# Altium PCB fyFly_cp2.PcbDoc
Units mm, origin at the board's own origin, x right, y up, seen from the top; angles counter-clockwise.
Board outline 49.87 x 64.77 mm, 4 copper layers (Top Layer, MID1, MID2, Bottom Layer), stack 0.603 mm thick; 23 components, 77 nets, 66 pads, 40 vias.
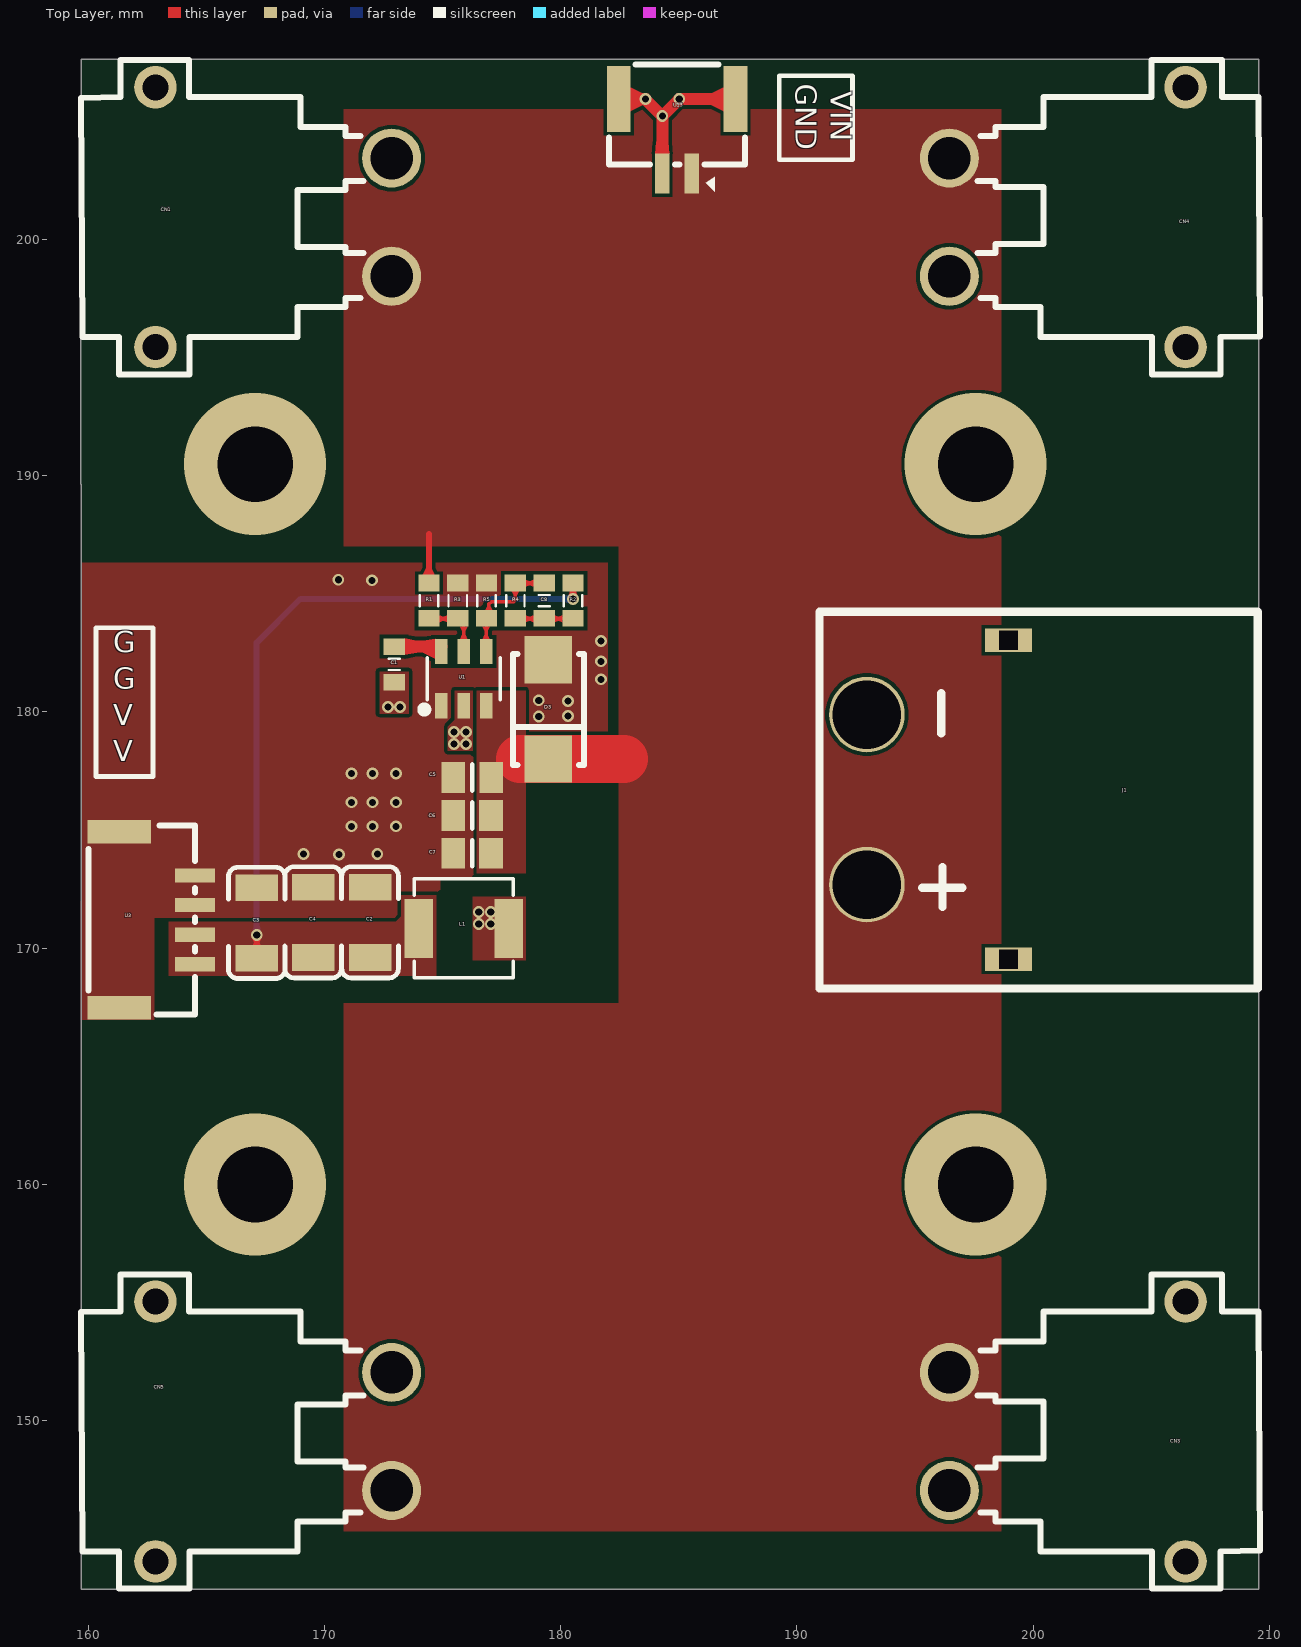
[diagram p0: Top Layer view]
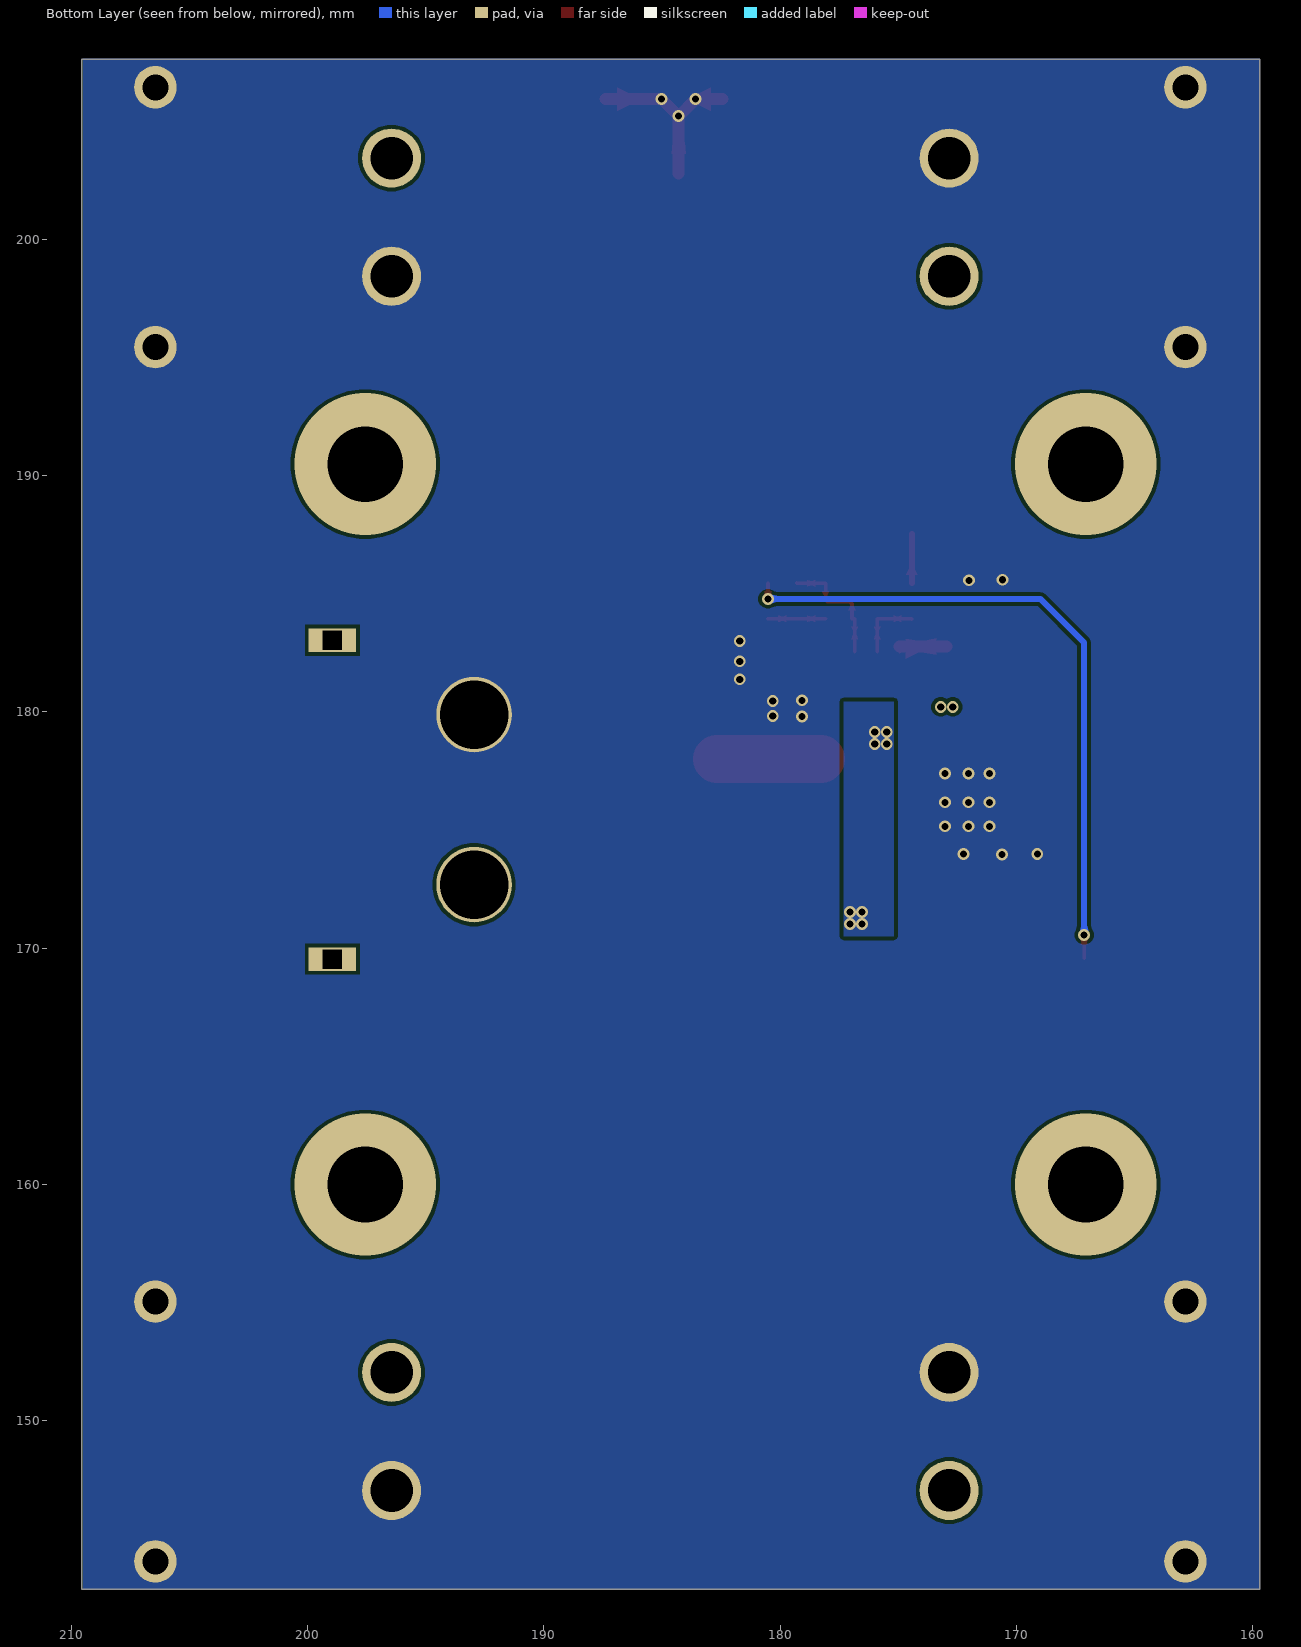
[diagram p1: Bottom Layer view, seen from below]
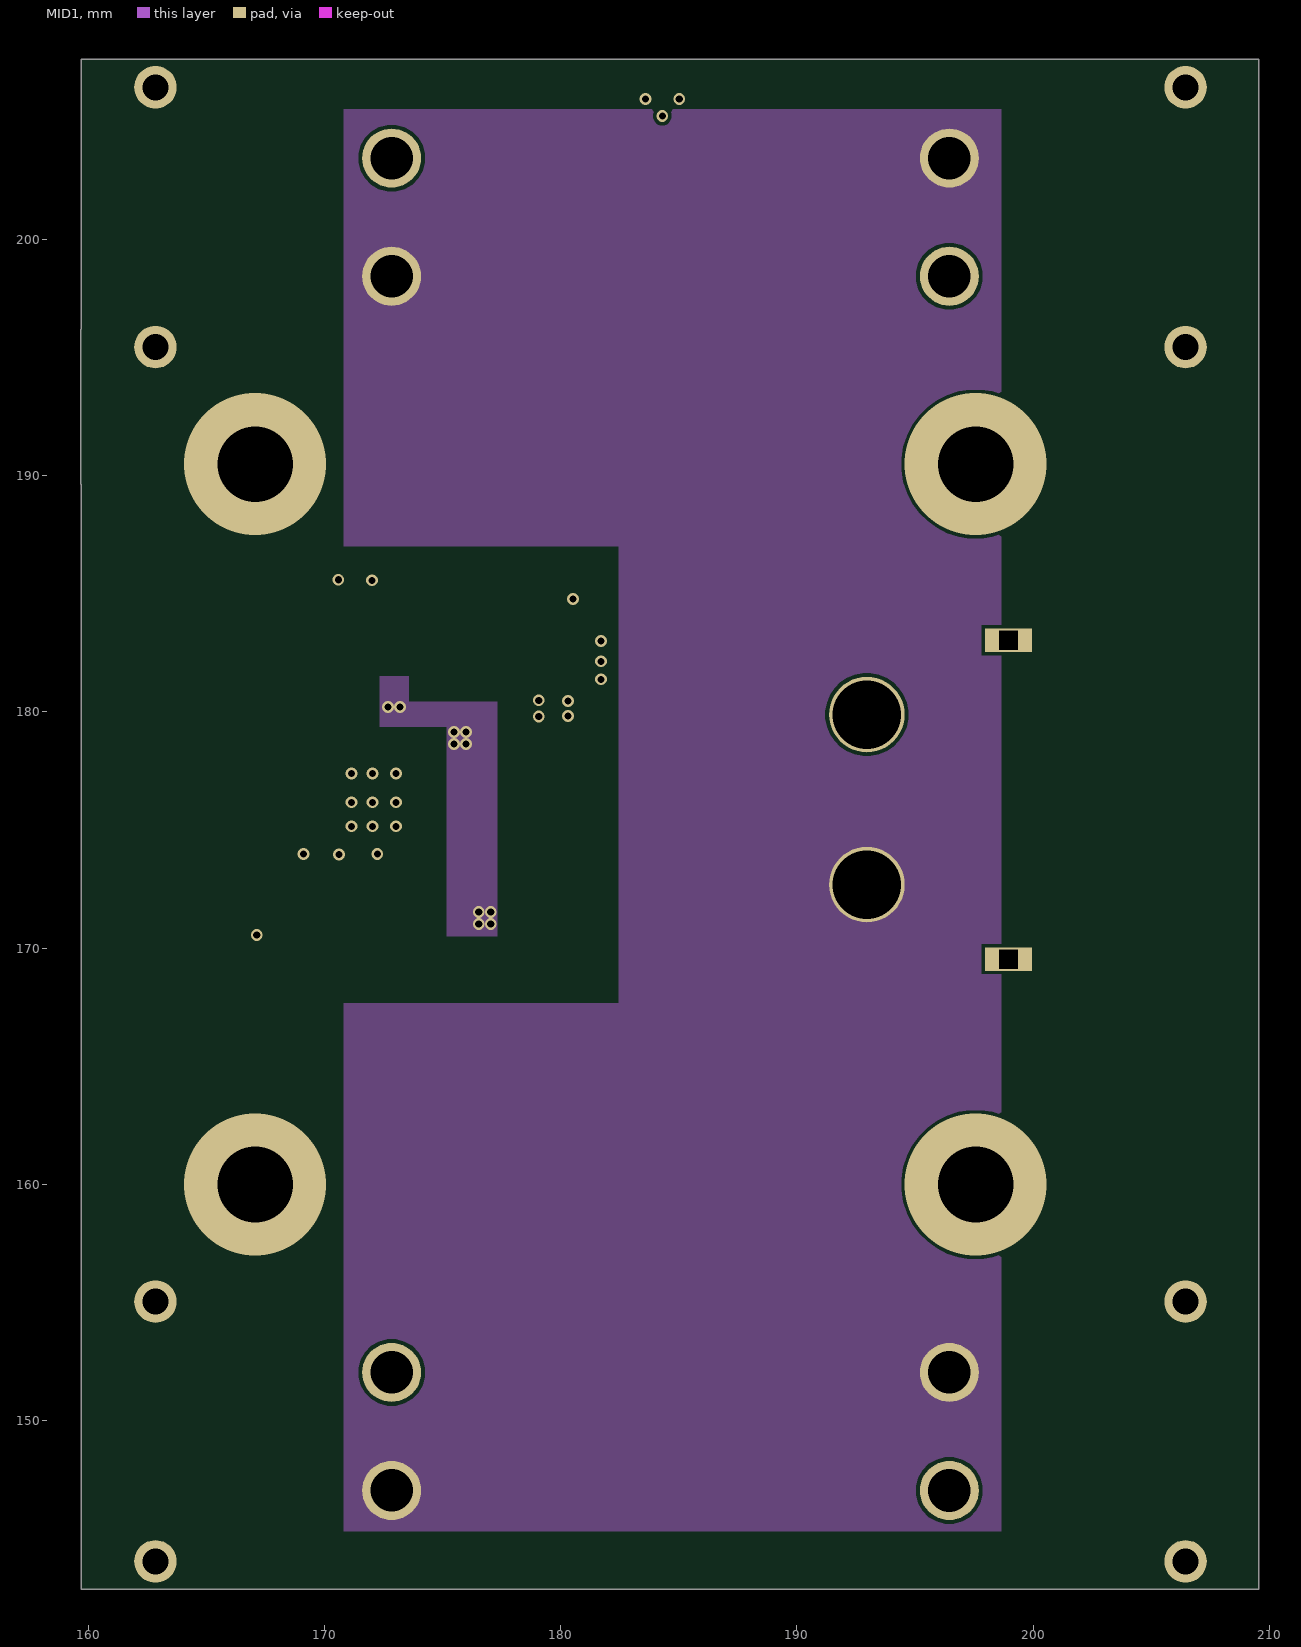
[diagram p2: MID1]
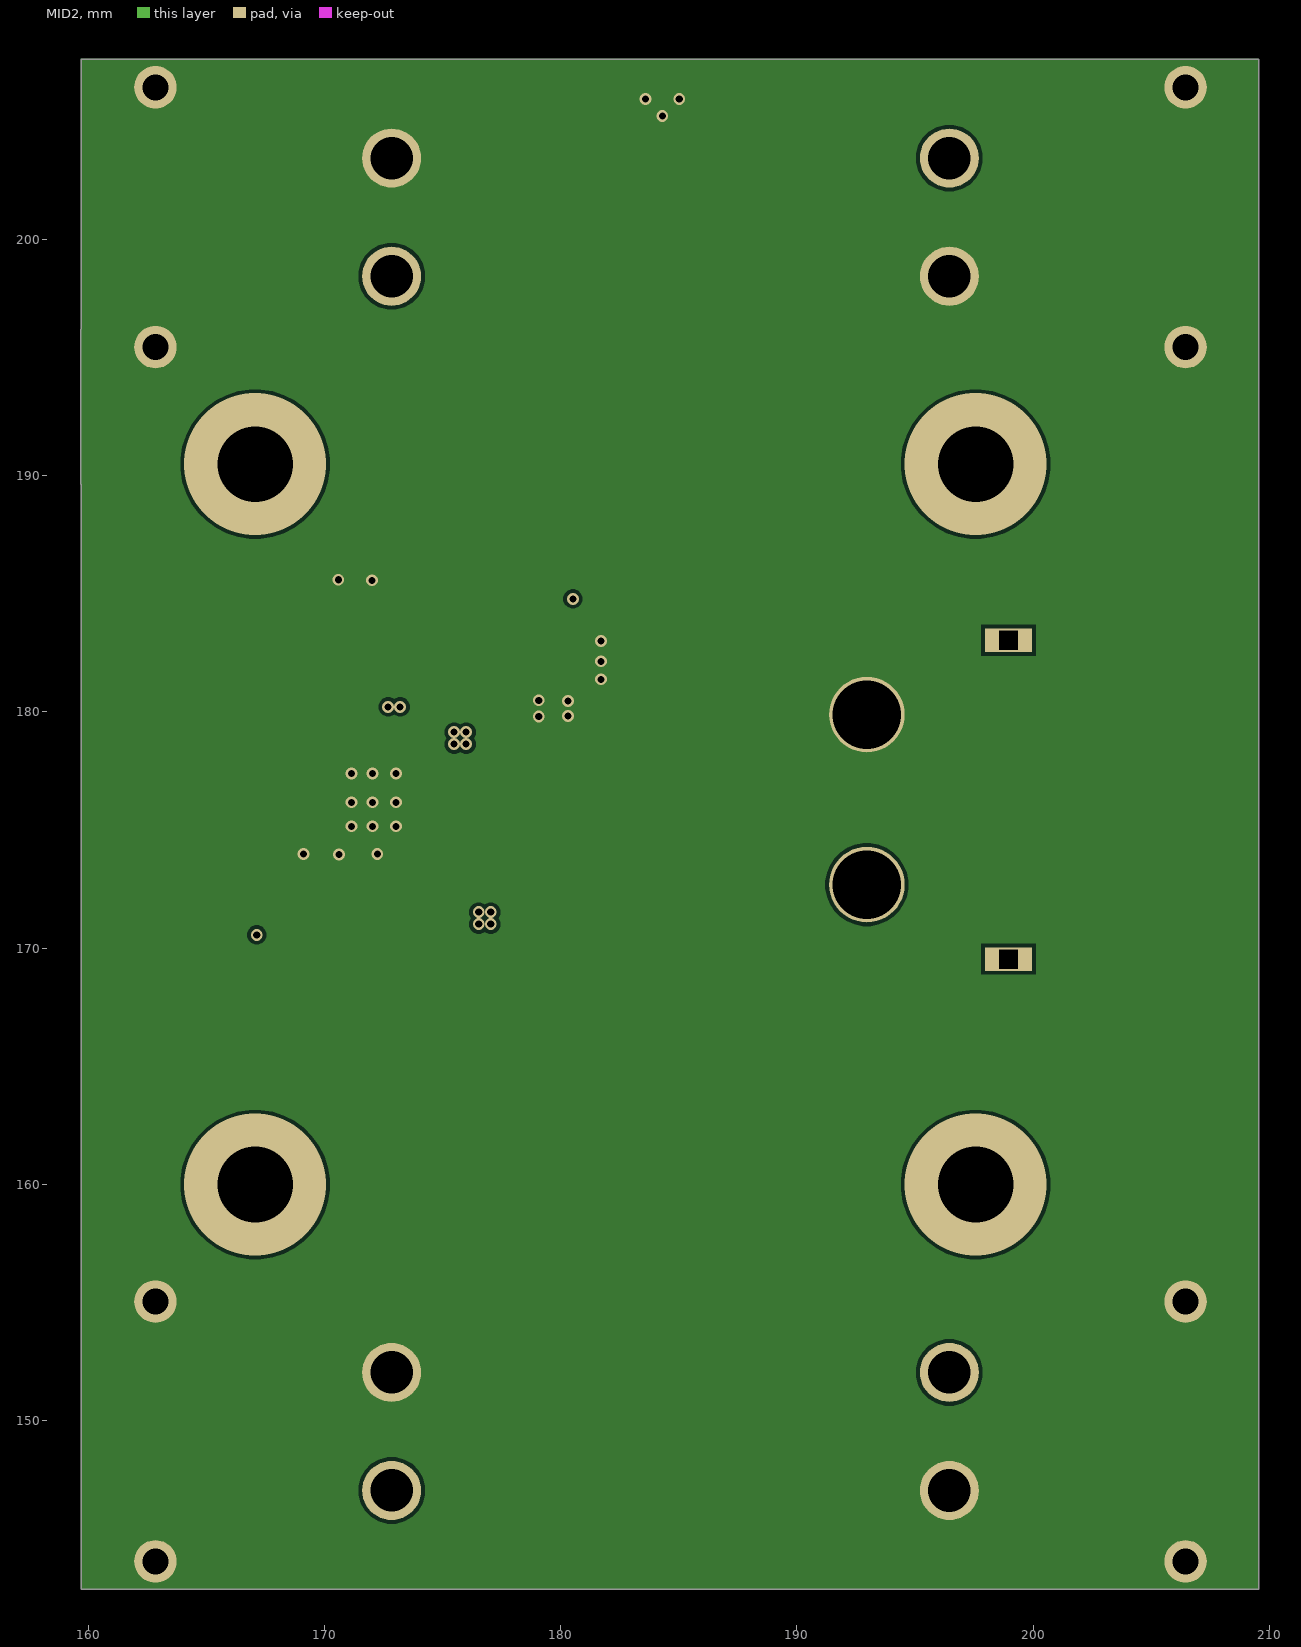
[diagram p3: MID2]
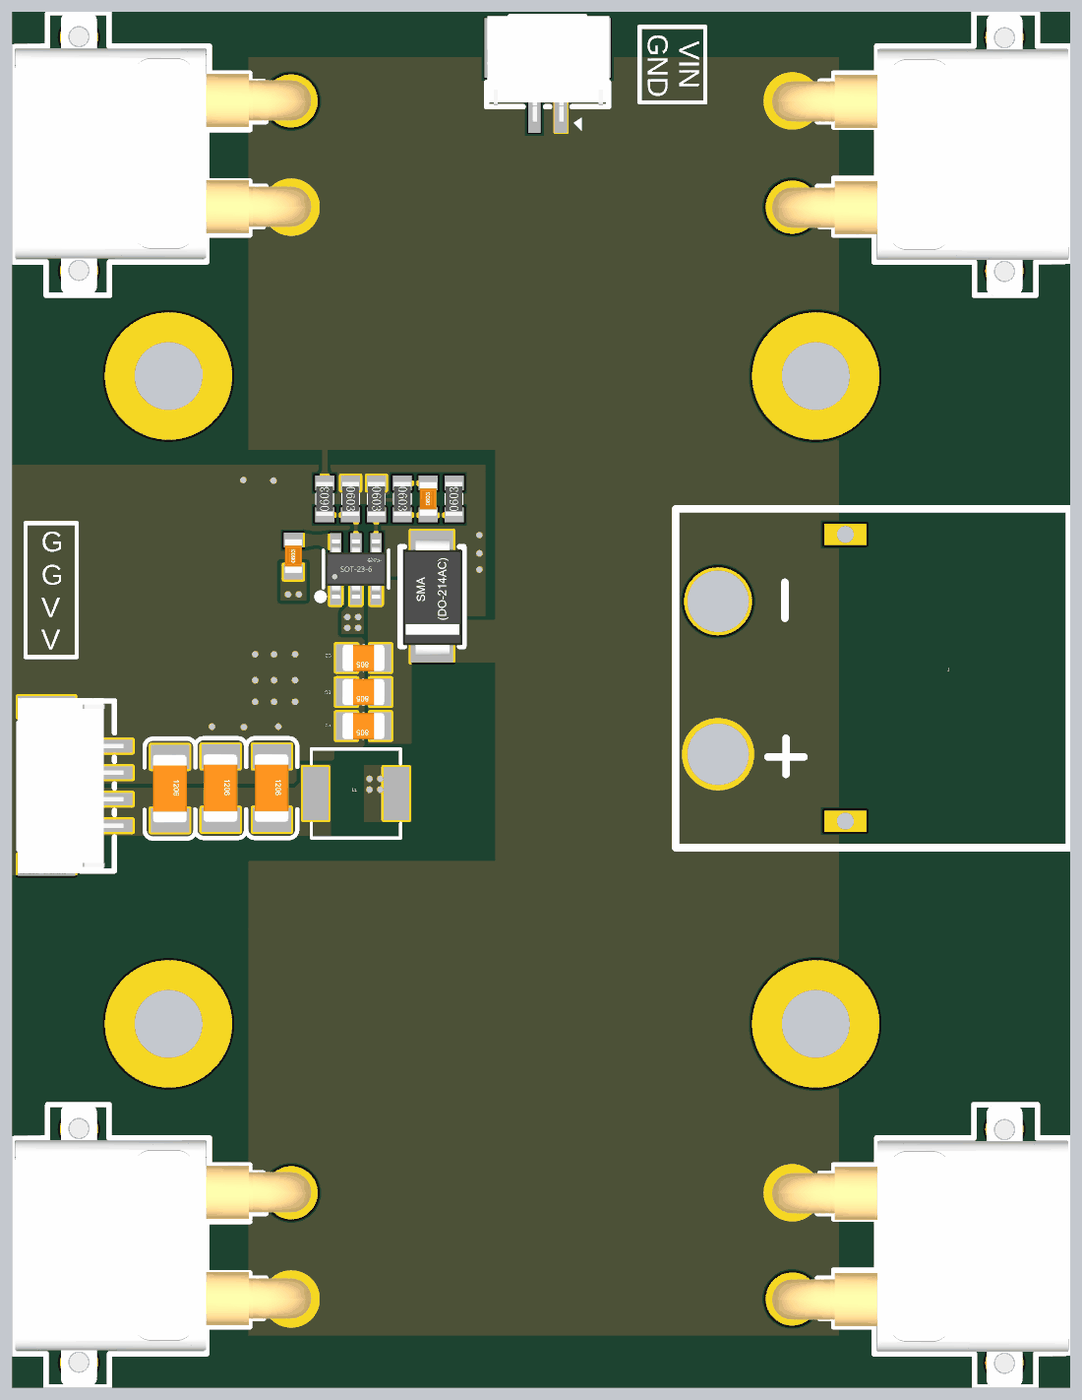
[diagram p4: 3D render of the assembled board from above, using the file's embedded part models]

## Layer stack, top to bottom
Top Solder: solder mask 0.0102, Solder Resist, Dk 3.5
Top Layer: signal copper 0.0356
Dielectric 2: prepreg 0.0711, PP-006, Dk 4.1
MID1: signal copper 0.035
Dielectric 1: dielectric 0.32, FR-4, Dk 4.8
MID2: signal copper 0.035
Dielectric 3: prepreg 0.0711, PP-006, Dk 4.1
Bottom Layer: signal copper 0.0356
Bottom Solder: solder mask 0.0102, Solder Resist, Dk 3.5

## Board outline
159.696,142.868 159.696,189.636 159.69,189.636 159.69,196.208 159.696,196.208 159.696,207.638 209.562,207.638 209.562,142.868

## Design rules (kind name [scope] priority, off if disabled: settings)
Clearance [All] p1: gap=0.152 ignorepadtopadclearanceinfootprint=TRUE except(0: Arc-Hole Track-Hole SMDPad-Hole THPad-Hole Via-Hole Fill-Hole Poly-Hole Region-Hole Text-Hole)
PlaneConnect PlaneConnect_1 [InNet('NetC1_2')] p1: planeconnectstyle=Direct reliefexpansion=0.508 reliefentries=4 reliefconductorwidth=0.254 reliefairgap=0.254
PlaneConnect [All] p2: planeconnectstyle=Direct reliefexpansion=0.508 reliefentries=4 reliefconductorwidth=0.254 reliefairgap=0.254
PolygonConnect PolygonConnect_4 [InNet('VIN_GND')] p1: connectstyle=Direct reliefconductorwidth=0.254 reliefentries=4 polygonreliefangle="90 Angle" airgapwidth=0.254
PolygonConnect PolygonConnect_3 [InNet('VCC-5.0V_OUT')] p2: connectstyle=Direct reliefconductorwidth=0.254 reliefentries=4 polygonreliefangle="90 Angle" airgapwidth=0.254
PolygonConnect PolygonConnect_2 [InNet('VIN')] p3: connectstyle=Direct reliefconductorwidth=0.254 reliefentries=4 polygonreliefangle="90 Angle" airgapwidth=0.254
PolygonConnect PolygonConnect_1 [InNet('NetC1_2')] p4: connectstyle=Direct reliefconductorwidth=0.254 reliefentries=4 polygonreliefangle="90 Angle" airgapwidth=0.254
PolygonConnect [All] p5: connectstyle=Direct reliefconductorwidth=0.254 reliefentries=4 polygonreliefangle="90 Angle" airgapwidth=0.254
RoomDefinition 03_peripheral [InComponentClass('03_peripheral')] p1: confinementstyle=ConfineOut formatcopy=TRUE lockcomponents=FALSE outline 244.653,139.319 515.874,139.319 515.874,158.877 244.653,158.877
RoomDefinition 02_sensor [InComponentClass('02_sensor')] p2: confinementstyle=ConfineOut formatcopy=TRUE lockcomponents=FALSE outline 244.754,162.179 259.334,162.179 259.334,168.021 244.754,168.021
RoomDefinition 01_mcu [InComponentClass('01_mcu')] p3: confinementstyle=ConfineOut formatcopy=TRUE lockcomponents=FALSE outline 244.653,171.45 309.753,171.45 309.753,191.262 244.653,191.262
RoomDefinition 00_power [InComponentClass('00_power')] p4: confinementstyle=ConfineOut formatcopy=TRUE lockcomponents=FALSE outline 244.348,194.437 340.487,194.437 340.487,212.09 244.348,212.09
RoutingVias [All] p1: holewidth=0.3 width=0.5 viastyle="Through Hole" minholewidth=0.3 minwidth=0.5 maxholewidth=225.755 maxwidth=253.975
SolderMaskExpansion [All] p1: expansion=0.102 istentingtop=FALSE
Width [All] p1: maxlimit=253.975 minlimit=0.152 preferedwidth=0.254
29 further rules are at their usual default settings.

## Components (designator, comment, footprint, x,y, rotation, side; value= is the part's Value field where it differs from the comment)
C1 "100nF/35V" 0603-C 172.949,182.016 r0 top
C2 "22uF/16V" 1206-C 171.933,171.094 r0 top
C3 "22uF/16V" 1206-C 167.132,171.069 r0 top
C4 "22uF/16V" 1206-C 169.52,171.094 r0 top
C5 "10uF/35V" 0805-C 176.254,177.222 r90 top
C6 "10uF/35V" 0805-C 176.251,175.616 r90 top
C7 "100nF/35V" 0805-C 176.251,174.015 r90 top
C8 "75pF" 0603-C 179.299,184.709 r0 top
CN1 "XT30PW-M" XT30PW-M 167.844,200.946 r270 top locked
CN3 "XT30PW-M" XT30PW-M 201.452,149.54 r90 top locked
CN4 "XT30PW-M" XT30PW-M 201.452,200.946 r90 top locked
CN5 "XT30PW-M" XT30PW-M 167.844,149.541 r270 top locked
D3 "SMAJ18.0CA" ZENER 179.476,180.111 r90 top
J1 "XT60PW-M" XT60PW-M 192.959,172.688 r270 top
L1 "10uH" "电感 4.2X4.4" 175.895,170.84 r180 top
R1 "511K" 0603-R 174.422,184.709 r180 top
R2 "49.9R" 0603-R 180.518,184.709 r180 top
R3 "105K" 0603-R 175.641,184.709 r0 top
R4 "100K" 0603-R 178.079,184.709 r0 top
R5 "13.3K" 0603-R 176.86,184.709 r0 top
U1 "TPS54302DDCR" TPS54302 175.895,181.407 r0 top
U3 "GH1.25-4P" CONN-SMD_GH1.25-4PWBPZ 162.916,171.196 r90 top
U13 "GH1.25-2P" GH1.25-2P 184.926,204.368 r180 top locked

## Footprints (in the part's own frame and the unit in brackets; to place one, negate y for a bottom-side part, rotate by r counter-clockwise, add the part's x,y. Pads: shape width x height; smd on the part's side, far side on the other; paste and mask are expansions set on the pad)
0603-C [mm]
  rect 0.9x0.7 smd: 1(0,0.75) 2(0,-0.75)
  silkscreen extent -0.24,-0.24 0.24,0.24, body extent -0.41,-0.8 0.41,0.8, height 0.84
0603-R [mm]
  rect 0.9x0.7 smd: 1(0,0.75) 2(0,-0.75)
  silkscreen extent -0.39,-0.24 0.39,0.24, body extent -0.4,-0.8 0.4,0.8, height 0.45
0805-C [mm]
  rect 1.3x1 smd: 1(0,0.8) 2(0,-0.8)
  silkscreen extent -0.55,0 0.55,0, body extent -0.63,-1 0.62,1, height 0.77
1206-C [mm]
  rect 1.8x1.13 smd: 1(0,1.49) 2(0,-1.49)
  silkscreen extent -1.2,-2.36 1.2,2.36, body extent -0.81,-1.6 0.79,1.6, height 1
CONN-SMD_GH1.25-4PWBPZ [mm]
  rect 0.6x1.7 smd: 1(-1.875,-1.601) 2(-0.625,-1.601) 3(0.625,-1.601) 4(1.875,-1.601)
  rect 1x2.7 smd: 5(-3.725,1.601) 6(3.725,1.601)
  silkscreen extent -4,-1.6 4,2.9, body extent -4.13,-2.05 4.13,2.95, height 4.35
GH1.25-2P [mm]
  rect 0.6x1.7 smd paste+0 mask+0.05: 1(-0.625,1.575) 2(0.625,1.575)
  rect 1x2.8 smd paste+0 mask+0.05: 3(2.475,-1.575) 4(-2.475,-1.575)
  silkscreen extent -2.87,-3.05 2.87,2.34, body extent -2.91,-3.07 2.85,1.93, height 4.35
TPS54302 [mm]
  rect 0.532x1.072 smd: 1(-0.95,-1.149) 2(0,-1.149) 3(0.95,-1.149) 4(0.95,1.149) 5(0,1.149) 6(-0.95,1.149)
  silkscreen extent -1.82,-1.45 1.54,0.89, body extent -1.44,-1.4 1.44,1.4, height 1.64
XT30PW-M [mm]
  round 2.5 hole 1.8: 1(-2.5,5) 2(2.5,5)
  round 1.8 hole 1.1: 3(5.5,-5) 4(-5.5,-5)
  silkscreen extent -6.65,-8.15 6.65,3.81, body extent -6.68,-8.01 6.62,5.94, height 5
XT60PW-M [mm]
  round 3.2 hole 2.9: 1(-7.2,0) 2(0,0)
  rect 1x2 hole 0.8 square: 3(3.15,6) 4(-10.35,6)
  silkscreen extent -11.55,-2 4.4,16.55, body extent -11.6,-1.9 4.4,16.5, height 8.5
ZENER [mm]
  rect 2x2 smd: 1(2.1,0) 2(-2.1,0)
  silkscreen extent -2.35,-1.5 2.35,1.5, body extent -2.79,-1.43 2.71,1.37, height 2.6
"电感 4.2X4.4" [mm]
  rect 1.2x2.5 smd: 1(-1.9,0) 2(1.9,0)
  silkscreen extent -2.1,-2.1 2.1,2.1

## Part data
C1 C2 C3 C4 C5 C6 C7 C8: library part C, "贴片电容", BOM名称=无极性贴片电容, 联系卖家，免费查找封装=唯一出售店铺网址https://shop463601444.taobao.com
CN1 CN3 CN4 CN5: Colour=-, Contact Resistance=1.2mΩ, JLCPCB Part Class="Extended Part", LCSC Part Name="AMASS(艾迈斯)航模插头 卧式弯脚 XT30PW-M公头", Manufacturer=AMASS(艾迈斯), RatedCurrent=15A, RatedVoltage="DC 500V", Add into BOM=yes, Belt length=-, Brand=艾迈斯, Convert to PCB=yes, Datasheet=https://atta.szlcsc.com/upload/public/pdf/source/20220222/6A9F22F7850E25B33E1BE430ADF8560B.pdf, Device=XT30PW-M, FlameRetardantGrade=-, Input=-, InsulationMaterial=-, Interface=-, InterfaceType=公头, Manufacturer Part=XT30PW-M, MaximumCurrent=-, MetalMaterial=-, Model=XT30PW-M, NumberOfUSBHoles=-, Output=-, Power=-, RecommendedWireGauge=16/18/20AWG, Size=-, specifications=2pin, Supplier=LCSC, Supplier Footprint=-, Supplier Part=C431092, Symbol=XT30PW-M, Type=航模插头, Type1=-
D3: library part SMAJ6.0CA, "SMAJ6.0CA_C698928", BOM_JLCPCB Part Class="Extended Part", BOM_Manufacturer="Yangzhou Yangjie Elec Tech", BOM_Manufacturer Part=SMAJ6.0CA, BOM_Supplier=LCSC, BOM_Supplier Part=C698928, Contributor=LCSC, spicePre=D, spiceSymbolName=SMAJ6.0CA_C698928
J1: "PCB Power Connector", Manufacturer_Name=Amass, Manufacturer_Part_Number=XT60PW-F, Datasheet Link=https://www.tme.eu/sl/Document/ce4077e36b79046da520ca73227e15de/XT30PW%20SPEC.pdf, Height=8.4mm
L1: library part L, "L", BOM_JLCPCB Part Class="Extended Part", BOM_Manufacturer=Sunlord, BOM_Manufacturer Part=UPZ2012D800-4R0TF, BOM_Supplier=LCSC, BOM_Supplier Part=C145060, Contributor=LCSC, nameAlias=Value, spicePre=L, spiceSymbolName=UPZ2012D800-4R0TF
R1 R2 R3 R4 R5: library part R, "贴片电阻", BOM名称=贴片电阻, 联系卖家，免费查找封装=唯一出售店铺网址https://shop463601444.taobao.com
U1: Input Voltage=4.5V~28V, JLCPCB Part Class="Extended Part", LCSC Part Name="降压型 输入4.5V~28V 输出596mV~28V 3A", Manufacturer=TI(德州仪器), Operating Temperature=-40℃~+125℃@(TJ), Output Current (Max)=3A, Output Voltage=596mV~28V, Switching Frequency=400kHz, Add into BOM=yes, Convert to PCB=yes, Datasheet=https://atta.szlcsc.com/upload/public/pdf/source/20181023/C311983_0948EE70BFAD2011B492BD3F4CEA709D.pdf, Device=TPS54302DDCR, Function=降压型, Manufacturer Part=TPS54302DDCR, Number of Outputs=1, Output Type=可调, Supplier=LCSC, Supplier Footprint=TSOT-23-6, Supplier Part=C311983, Symbol=TPS54302DDCR_C311983, Synchronous Rectification=是, Topology=降压式
U3: "GH1.25-4PWBPZ", BOM_Manufacturer=BOOMELE(博穆精密), BOM_Manufacturer Part=GH1.25-4PWBPZ, BOM_Supplier=LCSC, BOM_Supplier Part=C2829253, Contributor=LCSC, spicePre=U, spiceSymbolName=GH1.25-4PWBPZ
U13: Current Rating (Max)=1A, LCSC Part Name=BX-GH1.25-2PWT, Manufacturer=Bossie(博锡), Operating Temperature Range=-25℃~+85℃, Add into BOM=yes, Contact Material=磷铜, Contact Plating=锡, Convert to PCB=yes, Datasheet=https://atta.szlcsc.com/upload/public/pdf/source/20231017/25DD0A5C9398B9B8D9D2789B9E1BDAD3.pdf, Device=BX-GH1.25-2PWT, Manufacturer Part=BX-GH1.25-2PWT, Mounting Style=卧贴, Number of Pins=2P, Number of PINs Per Row=2, Number of Rows=1, Pins Structure=1x2P, Pitch=1.25mm, Reference Series=GH, Row Spacing=-, Supplier=LCSC, Supplier Footprint=SMD,P=1.25mm,卧贴, Supplier Part=C18077718, Symbol=BX-GH1.25-2PWT

## Via types
v1: diameter 0.5, hole 0.3, Top Layer to Bottom Layer, tented both sides, 36 vias
v2: diameter 6, hole 3.2, Top Layer to Bottom Layer, 4 vias

## Nets (pads, with @x,y where several pads share a name; then routed paths per layer and width w, separated by ;. In a path a pad name is that pad's centre, name@x,y a point inside that pad or via, vN(x,y) a via of type N, cw(c..) or ccw(c..) an arc to the next point about the centre after c; other vN are vias at no path point)
BOOT0: 
GND: 
ICM42670P_CS: 
LIS3MD_CS: 
NetC1_1: C1.1 U1.6 | length 2.2
  Top Layer w0.152: U1.6 U1.6@174.945,182.766
  Top Layer w0.508: C1.1 U1.6@174.945,182.766
NetC1_2: C1.2 L1.1 U1.2
  other v1: 176.53,171.018 177.038,171.018 176.53,171.526 177.038,171.526 175.489,178.638 175.997,178.638 175.489,179.146 175.997,179.146 172.695,180.213 173.203,180.213
NetC8_1: C8.1 R4.1 R5.2 U1.4 | length 5.2
  Top Layer w0.152: U1.4 176.845,183.947 176.96,183.947 176.96,184.569 177.049,184.658 177.99,184.658 178.079,184.747 178.079,185.447 179.287,185.447 C8.1
NetC8_2: C8.2 R2.1 R4.2 | length 2.4
  Top Layer w0.152: R4.2@178.079,183.947 R2.1@180.518,183.947
NetC25_2: 
NetCN2_A5: 
NetCN2_B5: 
NetD4_1: 
NetD5_1: 
NetD6_1: 
NetD7_1: 
NetD8_1: 
NetD9_1: 
NetD10_1: 
NetD11_1: 
NetD12_1: 
NetD13_1: 
NetD14_1: 
NetD15_1: 
NetD16_1: 
NetD17_1: 
NetD18_1: 
NetD19_1: 
NetLED1_2: 
NetLED2_2: 
NetQ1_1: 
NetR1_1: R1.1 R3.2 U1.5 | length 2.9
  Top Layer w0.152: R1.1@174.422,183.921 174.422,183.947 175.641,183.947 175.895,183.947 U1.5
NetR12_1: 
NRST: 
OSC_IN: 
OSC_OUT: 
powerInput: 
RGB_DATA: 
SBUS_IN: 
SPI1_MISO: 
SPI1_MOSI: 
SPI1_SCK: 
SPI3_MISO: 
SPI3_MOSI: 
SPI3_SCK: 
SPL06_CS: 
SWCLK: 
SWDIO: 
TIM4_CH1: 
TIM4_CH2: 
TIM4_CH3: 
TIM4_CH4: 
TIM9_CH1: 
TIM9_CH2: 
UART1_RX: 
UART1_TX: 
UART2_RX: 
UART2_TX: 
UART3_RX: 
UART3_TX: 
UART4_RX: 
UART4_TX: 
UART5_RX: 
UART6_RX: 
UART6_TX: 
USB_FS_D+: 
USB_FS_D-: 
VCAP1: 
VCAP2: 
VCC-3.3V#1: 
VCC-5.0V#1: 
VCC-5.0V_OUT: C2.2 C3.2 C4.2 L1.2 R2.2 U3.1 U3.2 | length 28.2
  Top Layer w0.152: C3.2 v1(167.132,170.561) ; v1(180.518,184.785) R2.2@180.518,185.447
  Bottom Layer w0.254: v1(167.132,170.561) 167.132,182.931 168.986,184.785 v1(180.518,184.785)
VCC_5.0V#1: 
VIN: C5.2 C6.2 C7.2 CN1.2 CN3.2 CN4.2 CN5.2 D3.2 J1.2 R1.2 U1.3 U13.1 | length 6.5
  Top Layer w0.152: 182.677,178.003 182.677,178.011
  Top Layer w0.254: R1.2 174.422,187.542
  Top Layer w2.032: 178.283,178.011 D3.2 182.677,178.011
VIN-USB: 
VIN_ADC: 
VIN_GND: C2.1 C3.1 C4.1 C5.1 C6.1 C7.1 CN1.1 CN1.3 CN1.4 CN3.1 CN3.3 CN3.4 CN4.1 CN4.3 CN4.4 CN5.1 CN5.3 CN5.4 D3.1 J1.1 R3.1 R5.1 U1.1 U3.3 U3.4 U3.5 U3.6 U13.2 U13.3 U13.4 | length 8
  Top Layer w0.508: U13.3 v1(183.585,205.943) v1(184.301,205.227) ; U13.2 v1(184.301,205.227) ; U13.4 v1(185.018,205.943) v1(184.301,205.227)
  other v1: 170.612,173.965 169.113,173.99 172.237,173.99 171.145,175.158 172.034,175.158 173.025,175.158 171.145,176.174 172.034,176.174 173.025,176.174 171.145,177.394 172.034,177.394 173.025,177.394 179.07,179.807 180.315,179.832 180.315,180.467 179.07,180.492 181.712,181.381 181.712,182.143 181.712,183.007 172.009,185.572 170.586,185.598
W25Q16_CS: 
pads on no net: J1.3 J1.4
copper on no net:
  other v2: 167.062,159.993 197.562,159.993 167.062,190.493 197.562,190.493

## Polygon pours and split planes (outlines as drawn)
NetC1_2 on MID1 "NETC1_2_L02_P008" (solid, pour order 8): 176.276,179.375 172.339,179.375 172.339,181.508 173.558,181.508 173.558,180.442 176.276,180.442
VIN on MID1 "VIN_L02_P013" (solid, remove dead copper, pour order 13): 170.815,205.511 170.815,187.02 182.448,187.02 182.448,167.665 170.815,167.665 170.815,145.313 198.653,145.313 198.653,205.511
NetC1_2 on MID1 "NETC1_2_L02_P010" (solid, remove dead copper, pour order 10): 175.184,180.442 175.184,170.51 177.317,170.51 177.317,180.442
VIN_GND on Top Layer "VIN_GND_L01_P023" (solid, pour order 23): 162.789,166.98 159.69,166.98 159.69,172.009 162.789,172.009
VIN_GND on Top Layer "VIN_GND_L01_P022" (solid, pour order 22): 181.991,186.309 181.991,171.298 159.696,171.298 159.696,186.309 181.966,186.309
VIN on Top Layer "VIN_L01_P015" (solid, remove dead copper, pour order 15): 170.815,205.511 170.815,187.02 182.448,187.02 182.448,167.665 170.815,167.665 170.815,145.313 198.653,145.313 198.653,205.511
VCC-5.0V_OUT on Top Layer "VCC-5.0V_OUT_L01_P011" (solid, pour order 11): 174.727,172.237 173.253,172.237 173.253,171.348 173.025,171.12 163.398,171.12 163.398,168.834 174.727,168.834
NetC1_2 on Top Layer "NETC1_2_L01_P006" (solid, pour order 6): 178.511,169.494 176.276,169.494 176.276,172.187 178.511,172.187
NetC1_2 on Top Layer "NETC1_2_L01_P003" (solid, pour order 3): 172.339,181.712 172.339,179.934 173.558,179.934 173.558,181.712
VIN on Top Layer "VIN_L01_P002" (solid, pour order 2): 176.454,180.899 176.454,173.177 178.511,173.177 178.511,180.899
NetC1_2 on Top Layer "NETC1_2_L01_P001" (solid, remove dead copper, pour order 1): 176.276,180.899 176.276,178.359 175.209,178.359 175.209,179.375 175.514,179.68 175.514,180.899
VIN_GND on Bottom Layer "VIN_GND_L04_P020" (solid, pour order 20): 159.69,207.645 159.69,142.875 209.499,142.875 209.499,207.645
NetC1_2 on Bottom Layer "NETC1_2_L04_P009" (solid, pour order 9): 175.184,180.442 175.184,170.51 177.317,170.51 177.317,180.442
VIN_GND on MID2 "VIN_GND_L03_P019" (solid, pour order 19): 159.69,207.645 159.69,142.875 209.499,142.875 209.499,207.645

## Other copper
Top Layer:
  pour cut-out: 178.676,176.833 181.991,176.833 181.991,171.298 178.676,171.298
  pour cut-out: 174.892,172.237 174.892,173.012 176.276,173.012 176.276,172.237

## Silkscreen, mask and mechanical layers (free items; w line width, h text height)
Top Overlay:
  lines w0.203: 160.325,177.267 162.738,177.267 162.738,183.566 160.833,183.566 160.325,183.566 160.325,177.267 ; 189.255,203.378 192.354,203.378 192.354,206.934 189.763,206.934 189.255,206.934 189.255,203.378
  text "GND" at 189.652,206.604 h1.52 r270
  text "VIN" at 191.135,206.272 h1.52 r270
  text "G" at 161.061,182.235 h1.52
  text "G" at 161.061,180.676 h1.52
  text "V" at 161.062,179.149 h1.52
  text "V" at 161.062,177.622 h1.52
Mechanical 1:
  lines w0.203: 159.69,196.208 159.69,189.636 159.696,189.636 159.696,160.877 159.696,142.868 209.562,142.868 209.562,195.339 209.562,207.638 159.696,207.638 159.696,196.208